# Altium PCB Open Source Programmable Load Main PCB.PcbDoc (part 1 of 2)
Units mil, origin at the board's own origin, x right, y up, seen from the top; angles counter-clockwise.
Board outline 6000 x 4000 mil, 2 copper layers (Top Layer, Bottom Layer); 90 components, 53 nets, 308 pads, 4 vias.
Unrouted connection lines stored in the file: 150.
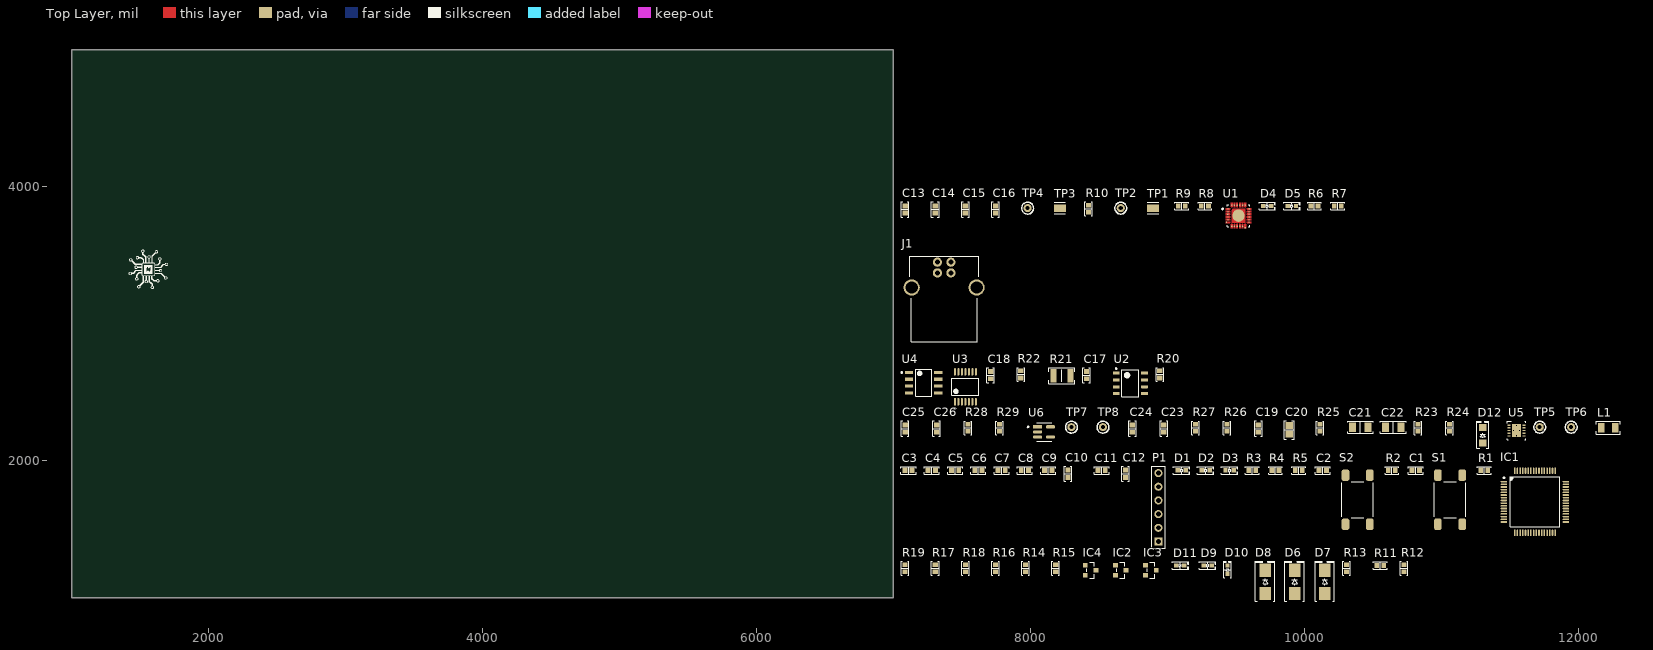
[diagram p0: Top Layer view]
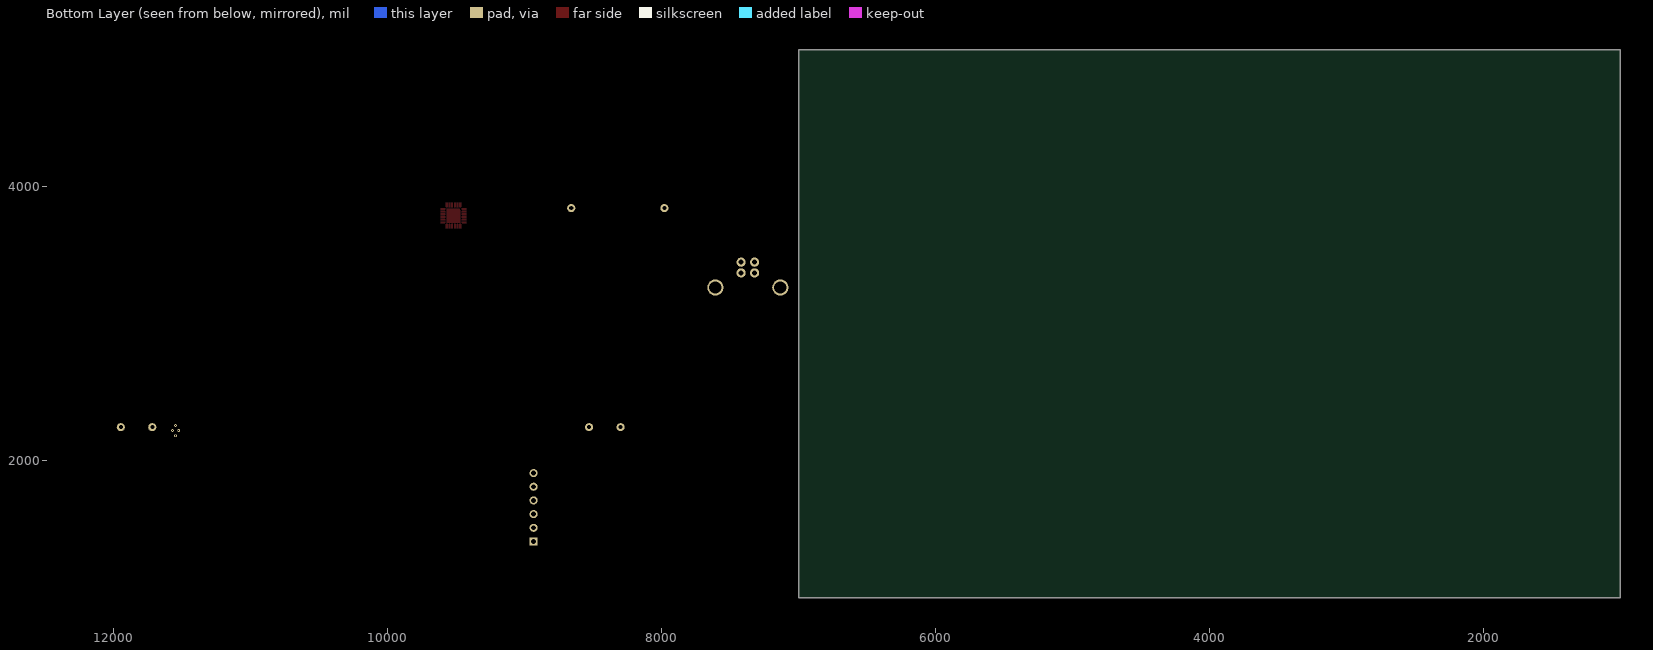
[diagram p1: Bottom Layer view, seen from below]

## Layer stack, top to bottom
Top Solder: solder mask 0.4, Solder Resist, Dk 3.5
Top Layer: signal copper 1.4
Dielectric 1: dielectric 12.6, FR-4, Dk 4.8
Bottom Layer: signal copper 1.4
Bottom Solder: solder mask 0.4, Solder Resist, Dk 3.5

## Board outline
1000,1000 7000,1000 7000,5000 1000,5000

## Design rules (kind name [scope] priority, off if disabled: settings)
Clearance [All] p1: gap=10 ignorepadtopadclearanceinfootprint=FALSE except(0: Arc-Hole Track-Hole SMDPad-Hole THPad-Hole Via-Hole Fill-Hole Poly-Hole Region-Hole Text-Hole)
DiffPairsRouting [All] p1: maxlimit=10 minlimit=10 mostfreqgap=10 toplayer_minwidth=15 toplayer_maxwidth=15 toplayer_prefwidth=15 bottomlayer_minwidth=15 bottomlayer_maxwidth=15 bottomlayer_prefwidth=15 maxuncoupledlength=500
PolygonConnect [All] p1: connectstyle=Relief reliefconductorwidth=10 reliefentries=4 polygonreliefangle="90 Angle" airgapwidth=10
RoomDefinition "USB Communication" [InComponentClass('USB Communication')] p1: confinementstyle=ConfineIn formatcopy=TRUE lockcomponents=FALSE outline 7045,3680 10320,3680 10320,4000 7045,4000
RoomDefinition "Top Level" [InComponentClass('Top Level')] p2: confinementstyle=ConfineIn formatcopy=TRUE lockcomponents=FALSE outline 7045,2840 7695,2840 7695,3630 7045,3630
RoomDefinition "Programmable Load" [InComponentClass('Programmable Load')] p3: confinementstyle=ConfineIn formatcopy=TRUE lockcomponents=FALSE outline 7045,2365 9100,2365 9100,2790 7045,2790
RoomDefinition Power [InComponentClass('Power')] p4: confinementstyle=ConfineIn formatcopy=TRUE lockcomponents=FALSE outline 7045,2080 12320,2080 12320,2400 7045,2400
RoomDefinition Microcontroller [InComponentClass('Microcontroller')] p5: confinementstyle=ConfineIn formatcopy=TRUE lockcomponents=FALSE outline 7045,1350 11955,1350 11955,2070 7045,2070
RoomDefinition "Fan Driver" [InComponentClass('Fan Driver')] p6: confinementstyle=ConfineIn formatcopy=TRUE lockcomponents=FALSE outline 7045,960 10875,960 10875,1375 7045,1375
RoutingVias [All] p1: holewidth=28 width=50 viastyle="Through Hole" minholewidth=28 minwidth=50 maxholewidth=28 maxwidth=50
SolderMaskExpansion [All] p1: expansion=4 istentingtop=FALSE
Width [All] p1: maxlimit=10 minlimit=10 preferedwidth=10
29 further rules are at their usual default settings.

## Classes and differential pairs
component class "USB Communication": C13 C14 C15 C16 D4 D5 R6 R7 R8 R9 R10 TP1 TP2 TP3 TP4 U1
component class "Top Level": J1
component class "Programmable Load": C17 C18 R20 R21 R22 U2 U3 U4
component class Power: C19 C20 C21 C22 C23 C24 C25 C26 D12 L1 R23 R24 R25 R26 R27 R28 R29 TP5 TP6 TP7 TP8 U5 U6
component class Microcontroller: C1 C2 C3 C4 C5 C6 C7 C8 C9 C10 C11 C12 D1 D2 D3 IC1 P1 R1 R2 R3 R4 R5 S1 S2
component class "Fan Driver": D6 D7 D8 D9 D10 D11 IC2 IC3 IC4 R11 R12 R13 R14 R15 R16 R17 R18 R19
differential pair USB: +USB_P -USB_N

## Components (designator, comment, footprint, x,y, rotation, side; value= is the part's Value field where it differs from the comment)
C1 "0.1 µF" "CAP 0603_1608" 10815,1930 r0 top
C2 "0.1 µF" "CAP 0603_1608" 10135,1930 r0 top
C3 "1 µF" "CAP 0603_1608" 7110,1930 r0 top
C4 "10000 pF" "CAP 0603_1608" 7280,1930 r0 top
C5 "4.7 µF" "CAP 0603_1608" 7450,1930 r0 top
C6 "0.1 µF" "CAP 0603_1608" 7620,1930 r0 top
C7 "4.7 µF" "CAP 0603_1608" 7790,1930 r0 top
C8 "0.1 µF" "CAP 0603_1608" 7960,1930 r0 top
C9 "4.7 µF" "CAP 0603_1608" 8130,1930 r0 top
C10 "0.1 µF" "CAP 0603_1608" 8275,1905 r90 top
C11 "4.7 µF" "CAP 0603_1608" 8520,1930 r0 top
C12 "0.1 µF" "CAP 0603_1608" 8695,1905 r90 top
C13 "4.7 µF" "CAP 0603_1608" 7085,3835 r90 top
C14 "0.1 µF" "CAP 0603_1608" 7305,3835 r90 top
C15 "4.7 µF" "CAP 0603_1608" 7525,3835 r90 top
C16 "0.1 µF" "CAP 0603_1608" 7745,3835 r90 top
C17 "0.1 µF" "CAP 0603_1608" 8410,2625 r90 top
C18 "0.1 µF" "CAP 0603_1608" 7710,2625 r90 top
C19 "4.7 µF" "CAP 0603_1608" 9665,2235 r90 top
C20 "1 µF" "CAP 0805_2012" 9890,2225 r90 top
C21 "22 µF" "CAP 1206_3216 - 0.8MM" 10410,2245 r0 top
C22 "22 µF" "CAP 1206_3216 - 0.8MM" 10650,2245 r0 top
C23 "0.1 µF" "CAP 0603_1608" 8975,2235 r90 top
C24 "820 pF" "CAP 0603_1608" 8745,2235 r90 top
C25 "1 µF" "CAP 0603_1608" 7085,2235 r90 top
C26 "1 µF" "CAP 0603_1608" 7315,2235 r90 top
D1 "Blue" "LED 0603_1608 BLUE" 9105,1930 r0 top
D2 "Red" "LED 0603_1608 RED" 9280,1930 r0 top
D3 "Green" "LED 0603_1608 GREEN" 9455,1930 r0 top
D4 "Blue" "LED 0603_1608 BLUE" 9730,3860 r0 top
D5 "Red" "LED 0603_1608 RED" 9910,3860 r0 top
D6 "S2A-13-F" "DO214AA SMB" 9930,1115 r90 top
D7 "S2A-13-F" "DO214AA SMB" 10150,1115 r90 top
D8 "S2A-13-F" "DO214AA SMB" 9715,1115 r90 top
D9 "Green" "LED 0603_1608 GREEN" 9295,1235 r0 top
D10 "Green" "LED 0603_1608 GREEN" 9440,1205 r90 top
D11 "Green" "LED 0603_1608 GREEN" 9095,1235 r0 top
D12 "V3F6HM3/H" "SMF DO-219AB" 11305,2185 r90 top
IC1 "STM32F446RET6" "ST LQFP-64 10X10MM" 11685,1700 r0 top
IC2 "DMG3418L-7" "DIODES SOT-23-3" 8660,1200 r0 top
IC3 "DMG3418L-7" "DIODES SOT-23-3" 8880,1200 r0 top
IC4 "DMG3418L-7" "DIODES SOT-23-3" 8440,1200 r0 top
J1 "61729-1011BLF" "FCI USB 61729-1011BLF" 7370,3265 r0 top
L1 "3.3µH" "IND 1008_2520" 12220,2240 r0 top
P1 "Header 6" HDR1X6 8935,1410 r90 top
R1 "100 kOhms" "RES 0603_1608" 11315,1930 r0 top
R2 "100 kOhms" "RES 0603_1608" 10640,1930 r0 top
R3 "1 kOhms" "RES 0603_1608" 9620,1930 r0 top
R4 "1 kOhms" "RES 0603_1608" 9790,1930 r0 top
R5 "1 kOhms" "RES 0603_1608" 9960,1930 r0 top
R6 "470 Ohms" "RES 0603_1608" 10075,3860 r0 top
R7 "470 Ohms" "RES 0603_1608" 10245,3860 r0 top
R8 "22.1 kOhms" "RES 0603_1608" 9275,3860 r0 top
R9 "47.5 kOhms" "RES 0603_1608" 9105,3860 r0 top
R10 "1 kOhms" "RES 0603_1608" 8425,3840 r90 top
R11 "4.7 kOhms" "RES 0603_1608" 10555,1235 r0 top
R12 "4.7 kOhms" "RES 0603_1608" 10730,1215 r90 top
R13 "4.7 kOhms" "RES 0603_1608" 10310,1215 r90 top
R14 "10 kOhms" "RES 0603_1608" 7965,1215 r90 top
R15 "10 kOhms" "RES 0603_1608" 8185,1215 r90 top
R16 "10 kOhms" "RES 0603_1608" 7745,1215 r90 top
R17 "10 kOhms" "RES 0603_1608" 7305,1215 r90 top
R18 "10 kOhms" "RES 0603_1608" 7525,1215 r90 top
R19 "10 kOhms" "RES 0603_1608" 7085,1215 r90 top
R20 "10 Ohms" "RES 0603_1608" 8945,2630 r90 top
R21 "2 mOhms" "STACKPOLE CSR1210" 8230,2620 r0 top
R22 "10 Ohms" "RES 0603_1608" 7930,2630 r90 top
R23 "0 Ohms" "RES 0603_1608" 10830,2240 r90 top
R24 "0 Ohms" "RES 0603_1608" 11060,2240 r90 top
R25 "158 kOhms" "RES 0603_1608" 10115,2240 r90 top
R26 "18 kOhms" "RES 0603_1608" 9435,2240 r90 top
R27 "68 kOhms" "RES 0603_1608" 9205,2240 r90 top
R28 "0 Ohms" "RES 0603_1608" 7545,2240 r90 top
R29 "0 Ohms" "RES 0603_1608" 7775,2240 r90 top
S1 "1571563-4" "TE FSM4JSMA" 11065,1715 r0 top
S2 "1571563-4" "TE FSM4JSMA" 10390,1715 r0 top
TP1 "S2751-46R" FP-S2751-46R-MFG 8895,3845 r0 top
TP2 "1.5mm Test Point" "1mm Test Point-Footprint-1" 8660,3845 r0 top
TP3 "S2751-46R" FP-S2751-46R-MFG 8215,3845 r0 top
TP4 "1.5mm Test Point" "1mm Test Point-Footprint-1" 7980,3845 r0 top
TP5 "1.5mm Test Point" "1mm Test Point-Footprint-1" 11720,2245 r0 top
TP6 "1.5mm Test Point" "1mm Test Point-Footprint-1" 11950,2245 r0 top
TP7 "1.5mm Test Point" "1mm Test Point-Footprint-1" 8300,2245 r0 top
TP8 "1.5mm Test Point" "1mm Test Point-Footprint-1" 8530,2245 r0 top
U1 "CP2102N-A02-GQFN24" FP-CP2102N-A02-GQFN24-MFG 9520,3790 r0 top
U2 "INA219AIDR" D0008A_L 8730,2565 r0 top
U3 "LMV324IPWR" FP-PW0014A-IPC_C 7525,2540 r90 top
U4 "LMV358IDR" FP-D0008A-MFG 7220,2570 r0 top
U5 "TPS61086DRCR" DRC0010A_V 11550,2220 r0 top
U6 "AP2112K-3.3TRG1" FP-SOT25-IPC_A 8100,2210 r0 top

## Footprints (in the part's own frame and the unit in brackets; to place one, negate y for a bottom-side part, rotate by r counter-clockwise, add the part's x,y. Pads: shape width x height; smd on the part's side, far side on the other; paste and mask are expansions set on the pad)
"1mm Test Point-Footprint-1" [mm]
  round 1.5 hole 0.75: 1(0,0)
  silkscreen extent -1.1,-1.1 1.1,1.1
"CAP 0603_1608" [mm] "Chip Capacitor, 2-Leads, Body 1.60x0.80mm, IPC Medium Density"
  rect 0.9x1 smd: 1(-0.675,0) 2(0.675,0)
  silkscreen extent -1.4,-0.7 1.4,0.7, body extent -0.8,-0.41 0.8,0.41, height 0.82
"CAP 0805_2012" [mm] "Chip Capacitor, 2-Leads, Body 2.00x1.20mm, IPC Medium Density"
  rect 1.3x1.4 smd: 1(-0.8,0) 2(0.8,0)
  silkscreen extent -1.7,-0.9 1.7,0.9, body extent -1,-0.64 1,0.64, height 1.26
"CAP 1206_3216 - 0.8MM" [mm] "Chip Capacitor, 2-Leads, Body 3.25x1.60mm, IPC Medium Density"
  rect 1.3x1.8 smd: 1(-1.45,0) 2(1.45,0)
  silkscreen extent -2.37,-1.12 2.37,1.12, body extent -1.6,-0.8 1.6,0.8, height 0.8
D0008A_L [mm] "SOIC, 8-Leads, Body 5x4mm, Pitch 1.27mm, IPC High Density"
  rrect18% 1.25x0.55 smd: 1(-2.625,1.905) 2(-2.625,0.635) 3(-2.625,-0.635) 4(-2.625,-1.905) 5(2.625,-1.905) 6(2.625,-0.635) 7(2.625,0.635) 8(2.625,1.905)
  silkscreen extent -2.75,-2.5 1.6,2.85, body extent -3,-2.45 3,2.45, height 1.63
"DIODES SOT-23-3" [mm] "SOT23, 3-Leads, Body 2.90x2.40mm, Pitch 0.95mm, IPC Medium Density"
  rect 0.9x0.8 smd: 1(-1,0.95) 2(-1,-0.95) 3(1,0)
  silkscreen extent -0.7,-1.45 0.7,1.45, body extent -1.41,-1.45 1.41,1.45, height 1.5
"DO214AA SMB" [mm] "Molded Diode, 2-Leads, Body 4.31x3.62mm, IPC Medium Density"
  rect 2.45x2.15 smd: 1(-2.15,0) 2(2.15,0)
  silkscreen extent -3.6,-1.8 3.8,1.8, body extent -2.6,-1.8 2.6,1.8, height 2.4
DRC0010A_V [mm] "SON, 10-Leads, Body 3x3mm, Pitch 0.5mm, Thermal Pad 2.4x1.65mm, TI Recommended"
  rrect42% 0.6x0.24 smd: 1(-1.4,1) 2(-1.4,0.5) 3(-1.4,0) 4(-1.4,-0.5) 5(-1.4,-1) 6(1.4,-1) 7(1.4,-0.5) 8(1.4,0) 9(1.4,0.5) 10(1.4,1)
  rrect6% 1.65x2.4 smd paste-0.825: 11(0,0)
  silkscreen extent -1.7,-1.7 1.7,1.7, body extent -1.55,-1.55 1.55,1.55, height 1.01
"FCI USB 61729-1011BLF" [mm]
  round 1.7 hole 0.92: 1(1.25,4.7) 2(-1.25,4.7) 3(-1.25,2.71) 4(1.25,2.71)
  round 3 hole 2.3: S(-6.02,0) S(6.02,0)
  silkscreen extent -6.4,-10.1 6.4,5.8, body extent -6.56,-10.18 6.56,5.76, height 11
FP-CP2102N-A02-GQFN24-MFG [mm]
  round 0.27 smd paste+0 mask+0: 1(-1.95,1.25) 2(-1.95,0.75) 3(-1.965,0.25) 4(-1.95,-0.25) 5(-1.95,-0.75) 6(-2.225,-1.25) 7(-1.25,-1.95) 8(-0.75,-1.95) 9(-0.25,-1.965) 10(0.25,-1.95) 11(0.75,-1.95) 12(1.25,-2.225) 13(1.95,-1.25) 14(1.95,-0.75) 15(1.965,-0.25) 16(1.95,0.25) 17(1.95,0.75) 18(1.965,1.25) 19(1.25,1.95) 20(0.75,1.95) 21(0.25,1.965) 22(-0.25,1.95) 23(-0.75,1.95) 24(-1.25,1.965)
  round 2.295 smd paste+0 mask+0: 25(0,0)
  Top Layer region: -1.275,-1.275 -1.275,1.025 -1.025,1.275 1.275,1.275 1.275,-1.275 -1.275,-1.275
  Top Layer region: -1.1,2.375 -1.1,1.675 -1.111,1.618 -1.144,1.569 -1.193,1.536 -1.25,1.525 -1.25,1.525 -1.307,1.536 -1.356,1.569 -1.389,1.618 -1.4,1.675 -1.4,1.675 -1.4,2.375
  Top Layer region: -0.6,2.375 -0.6,1.675 -0.611,1.618 -0.644,1.569 -0.693,1.536 -0.75,1.525 -0.75,1.525 -0.807,1.536 -0.856,1.569 -0.889,1.618 -0.9,1.675 -0.9,1.675 -0.9,2.375
  Top Layer region: -0.1,2.375 -0.1,1.675 -0.111,1.618 -0.144,1.569 -0.193,1.536 -0.25,1.525 -0.25,1.525 -0.307,1.536 -0.356,1.569 -0.389,1.618 -0.4,1.675 -0.4,1.675 -0.4,2.375
  Top Layer region: 0.4,2.375 0.4,1.675 0.389,1.618 0.356,1.569 0.307,1.536 0.25,1.525 0.25,1.525 0.193,1.536 0.144,1.569 0.111,1.618 0.1,1.675 0.1,1.675 0.1,2.375
  Top Layer region: 0.9,2.375 0.9,1.675 0.889,1.618 0.856,1.569 0.807,1.536 0.75,1.525 0.75,1.525 0.693,1.536 0.644,1.569 0.611,1.618 0.6,1.675 0.6,1.675 0.6,2.375
  Top Layer region: 1.4,2.375 1.4,1.675 1.389,1.618 1.356,1.569 1.307,1.536 1.25,1.525 1.25,1.525 1.193,1.536 1.144,1.569 1.111,1.618 1.1,1.675 1.1,1.675 1.1,2.375
  Top Layer region: 2.375,1.1 1.675,1.1 1.618,1.111 1.569,1.144 1.536,1.193 1.525,1.25 1.525,1.25 1.536,1.307 1.569,1.356 1.618,1.389 1.675,1.4 1.675,1.4 2.375,1.4
  Top Layer region: 2.375,0.6 1.675,0.6 1.618,0.611 1.569,0.644 1.536,0.693 1.525,0.75 1.525,0.75 1.536,0.807 1.569,0.856 1.618,0.889 1.675,0.9 1.675,0.9 2.375,0.9
  Top Layer region: 2.375,0.1 1.675,0.1 1.618,0.111 1.569,0.144 1.536,0.193 1.525,0.25 1.525,0.25 1.536,0.307 1.569,0.356 1.618,0.389 1.675,0.4 1.675,0.4 2.375,0.4
  Top Layer region: 2.375,-0.4 1.675,-0.4 1.618,-0.389 1.569,-0.356 1.536,-0.307 1.525,-0.25 1.525,-0.25 1.536,-0.193 1.569,-0.144 1.618,-0.111 1.675,-0.1 1.675,-0.1 2.375,-0.1
  Top Layer region: 2.375,-0.9 1.675,-0.9 1.618,-0.889 1.569,-0.856 1.536,-0.807 1.525,-0.75 1.525,-0.75 1.536,-0.693 1.569,-0.644 1.618,-0.611 1.675,-0.6 1.675,-0.6 2.375,-0.6
  Top Layer region: 2.375,-1.4 1.675,-1.4 1.618,-1.389 1.569,-1.356 1.536,-1.307 1.525,-1.25 1.525,-1.25 1.536,-1.193 1.569,-1.144 1.618,-1.111 1.675,-1.1 1.675,-1.1 2.375,-1.1
  Top Layer region: 1.1,-2.375 1.1,-1.675 1.111,-1.618 1.144,-1.569 1.193,-1.536 1.25,-1.525 1.25,-1.525 1.307,-1.536 1.356,-1.569 1.389,-1.618 1.4,-1.675 1.4,-1.675 1.4,-2.375
  Top Layer region: 0.6,-2.375 0.6,-1.675 0.611,-1.618 0.644,-1.569 0.693,-1.536 0.75,-1.525 0.75,-1.525 0.807,-1.536 0.856,-1.569 0.889,-1.618 0.9,-1.675 0.9,-1.675 0.9,-2.375
  Top Layer region: 0.1,-2.375 0.1,-1.675 0.111,-1.618 0.144,-1.569 0.193,-1.536 0.25,-1.525 0.25,-1.525 0.307,-1.536 0.356,-1.569 0.389,-1.618 0.4,-1.675 0.4,-1.675 0.4,-2.375
  Top Layer region: -0.4,-2.375 -0.4,-1.675 -0.389,-1.618 -0.356,-1.569 -0.307,-1.536 -0.25,-1.525 -0.25,-1.525 -0.193,-1.536 -0.144,-1.569 -0.111,-1.618 -0.1,-1.675 -0.1,-1.675 -0.1,-2.375
  Top Layer region: -0.9,-2.375 -0.9,-1.675 -0.889,-1.618 -0.856,-1.569 -0.807,-1.536 -0.75,-1.525 -0.75,-1.525 -0.693,-1.536 -0.644,-1.569 -0.611,-1.618 -0.6,-1.675 -0.6,-1.675 -0.6,-2.375
  Top Layer region: -1.4,-2.375 -1.4,-1.675 -1.389,-1.618 -1.356,-1.569 -1.307,-1.536 -1.25,-1.525 -1.25,-1.525 -1.193,-1.536 -1.144,-1.569 -1.111,-1.618 -1.1,-1.675 -1.1,-1.675 -1.1,-2.375
  Top Layer region: -2.375,-1.1 -1.675,-1.1 -1.618,-1.111 -1.569,-1.144 -1.536,-1.193 -1.525,-1.25 -1.525,-1.25 -1.536,-1.307 -1.569,-1.356 -1.618,-1.389 -1.675,-1.4 -1.675,-1.4 -2.375,-1.4
  Top Layer region: -2.375,-0.6 -1.675,-0.6 -1.618,-0.611 -1.569,-0.644 -1.536,-0.693 -1.525,-0.75 -1.525,-0.75 -1.536,-0.807 -1.569,-0.856 -1.618,-0.889 -1.675,-0.9 -1.675,-0.9 -2.375,-0.9
  Top Layer region: -2.375,-0.1 -1.675,-0.1 -1.618,-0.111 -1.569,-0.144 -1.536,-0.193 -1.525,-0.25 -1.525,-0.25 -1.536,-0.307 -1.569,-0.356 -1.618,-0.389 -1.675,-0.4 -1.675,-0.4 -2.375,-0.4
  Top Layer region: -2.375,0.4 -1.675,0.4 -1.618,0.389 -1.569,0.356 -1.536,0.307 -1.525,0.25 -1.525,0.25 -1.536,0.193 -1.569,0.144 -1.618,0.111 -1.675,0.1 -1.675,0.1 -2.375,0.1
  Top Layer region: -2.375,0.9 -1.675,0.9 -1.618,0.889 -1.569,0.856 -1.536,0.807 -1.525,0.75 -1.525,0.75 -1.536,0.693 -1.569,0.644 -1.618,0.611 -1.675,0.6 -1.675,0.6 -2.375,0.6
  Top Layer region: -2.375,1.4 -1.675,1.4 -1.618,1.389 -1.569,1.356 -1.536,1.307 -1.525,1.25 -1.525,1.25 -1.536,1.193 -1.569,1.144 -1.618,1.111 -1.675,1.1 -1.675,1.1 -2.375,1.1
  silkscreen extent -3.07,-2.05 2.05,2.05, body extent -2.48,-2.48 2.48,2.48, height 0.25
FP-D0008A-MFG [mm]
  rrect17% 1.55x0.6 smd paste+0 mask+0: 1(-2.7,1.905) 2(-2.7,0.635) 3(-2.7,-0.635) 4(-2.7,-1.905) 5(2.7,-1.905) 6(2.7,-0.635) 7(2.7,0.635) 8(2.7,1.905)
  silkscreen extent -4.17,-2.5 1.5,2.5, body extent -3.57,-2.75 3.57,2.75, height 0.25
FP-PW0014A-IPC_C [mm]
  rect 1.355x0.341 smd paste+0 mask+0: 1(-2.775,1.95)
  rrect100% 1.355x0.341 smd paste+0 mask+0: 2(-2.775,1.3) 3(-2.775,0.65) 4(-2.775,0) 5(-2.775,-0.65) 6(-2.775,-1.3) 7(-2.775,-1.95) 8(2.775,-1.95) 9(2.775,-1.3) 10(2.775,-0.65) 11(2.775,0) 12(2.775,0.65) 13(2.775,1.3) 14(2.775,1.95)
  silkscreen extent -4.17,-2.5 1.6,2.5, body extent -3.55,-2.6 3.55,2.6, height 0.25
FP-S2751-46R-MFG [mm]
  rect 2.2x1.4 smd paste+0 mask+0: 1(0,0)
  silkscreen extent -1.05,-1.07 1.05,1.07, body extent -1.2,-0.8 1.2,0.8, height 0.25
FP-SOT25-IPC_A [mm]
  rect 1.707x0.616 smd paste+0 mask+0: 1(-1.201,0.95)
  rrect100% 1.707x0.616 smd paste+0 mask+0: 2(-1.201,0) 3(-1.201,-0.95) 4(1.201,-0.95) 5(1.201,0.95)
  silkscreen extent -3.08,-1.75 1.4,1.75, body extent -2.55,-2 2.55,2, height 0.25
HDR1X6 [mm] "Connector; Header; 6 Position"
  rect 1.5x1.5 hole 0.9: 1(0,0)
  round 1.5 hole 0.9: 2(2.54,0) 3(5.08,0) 4(7.62,0) 5(10.16,0) 6(12.7,0)
  silkscreen extent -1.27,-1.27 13.97,1.27
"IND 1008_2520" [mm] "Chip Inductance, 2-leads, Body 2.5x2.1mm, IPC Medium Density"
  rect 1.2x1.75 smd: 1(-1.275,0) 2(1.275,0)
  silkscreen extent -2.18,-1.22 2.2,1.22, body extent -1.3,-1.05 1.3,1.05, height 1
"LED 0603_1608 BLUE" [mm] "Chip Diode, 2-Leads, Body 1.60x0.80mm, IPC Medium Density"
  rect 0.8x0.8 smd: 1(-0.75,0) 2(0.75,0)
  silkscreen extent -1.52,-0.7 1.52,0.7, body extent -0.8,-0.4 0.8,0.4, height 0.53
"LED 0603_1608 GREEN" [mm] "Chip Diode, 2-Leads, Body 1.60x0.80mm, IPC Medium Density"
  rect 0.8x0.8 smd: 1(-0.75,0) 2(0.75,0)
  silkscreen extent -1.52,-0.7 1.52,0.7, body extent -0.8,-0.4 0.8,0.4, height 0.53
"LED 0603_1608 RED" [mm] "Chip Diode, 2-Leads, Body 1.60x0.80mm, IPC Medium Density"
  rect 0.8x0.8 smd: 1(-0.75,0) 2(0.75,0)
  silkscreen extent -1.52,-0.7 1.52,0.7, body extent -0.8,-0.4 0.8,0.4, height 0.53
"RES 0603_1608" [mm] "Chip Resistor, 2-Leads, Body 1.60x0.80mm, IPC Medium Density"
  rect 0.85x0.95 smd: 1(-0.65,0) 2(0.65,0)
  silkscreen extent -1.27,-0.7 1.27,0.7, body extent -0.8,-0.4 0.8,0.4, height 0.45
"SMF DO-219AB" [mm] "Molded Diode, 2-Leads, Body 3.90x1.90mm, IPC Medium Density"
  rect 1.3x1.4 smd: 1(-1.45,0) 2(1.45,0)
  silkscreen extent -2.4,-1.1 2.59,1.1, body extent -1.5,-0.9 1.5,0.9, height 1.18
"ST LQFP-64 10X10MM" [mm] "LQFP, 64-Leads, Body 10.00x10.00mm, Pitch 0.50mm, IPC Medium Density"
  oval 1.2x0.3 smd: 1(-5.75,3.75) 2(-5.75,3.25) 3(-5.75,2.75) 4(-5.75,2.25) 5(-5.75,1.75) 6(-5.75,1.25) 7(-5.75,0.75) 8(-5.75,0.25) 9(-5.75,-0.25) 10(-5.75,-0.75) 11(-5.75,-1.25) 12(-5.75,-1.75) 13(-5.75,-2.25) 14(-5.75,-2.75) 15(-5.75,-3.25) 16(-5.75,-3.75) 33(5.75,-3.75) 34(5.75,-3.25) 35(5.75,-2.75) 36(5.75,-2.25) 37(5.75,-1.75) 38(5.75,-1.25) 39(5.75,-0.75) 40(5.75,-0.25) 41(5.75,0.25) 42(5.75,0.75) 43(5.75,1.25) 44(5.75,1.75) 45(5.75,2.25) 46(5.75,2.75) 47(5.75,3.25) 48(5.75,3.75)
  oval 0.3x1.2 smd: 17(-3.75,-5.75) 18(-3.25,-5.75) 19(-2.75,-5.75) 20(-2.25,-5.75) 21(-1.75,-5.75) 22(-1.25,-5.75) 23(-0.75,-5.75) 24(-0.25,-5.75) 25(0.25,-5.75) 26(0.75,-5.75) 27(1.25,-5.75) 28(1.75,-5.75) 29(2.25,-5.75) 30(2.75,-5.75) 31(3.25,-5.75) 32(3.75,-5.75) 49(3.75,5.75) 50(3.25,5.75) 51(2.75,5.75) 52(2.25,5.75) 53(1.75,5.75) 54(1.25,5.75) 55(0.75,5.75) 56(0.25,5.75) 57(-0.25,5.75) 58(-0.75,5.75) 59(-1.25,5.75) 60(-1.75,5.75) 61(-2.25,5.75) 62(-2.75,5.75) 63(-3.25,5.75) 64(-3.75,5.75)
  silkscreen extent -5.87,-4.6 4.6,4.6, body extent -6.01,-6.01 6.01,6.01, height 1.6
"STACKPOLE CSR1210" [mm] "Chip Resistor, 2-Leads, Body 3.1x2.6mm, IPC Medium Density"
  rect 1.15x2.5 smd: 1(-1.575,0) 2(1.575,0)
  silkscreen extent -2.4,-1.5 2.4,1.5, body extent -1.6,-1.3 1.6,1.3, height 0.55
"TE FSM4JSMA" [mm]
  rrect50% 1.4x2.1 smd: 1(2.25,4.55) 2(2.25,-4.55) 3(-2.25,4.55) 4(-2.25,-4.55)
  silkscreen extent -2.92,-3.3 2.92,3.3, body extent -3,-5 3,5, height 5.08

## Part data
C1 C2 C6 C8 C10 C12 C14 C16 C17 C18 C23: library part C0603C104K5RAC7411, "CAP CER 0.1UF 50V X7R 0603", Device Package="0603 (1608 Metric)", manufacturer=KEMET, Operating Temperature="-55°C ~ 125°C", Supplier Part Number 1=399-7374-2-ND, Temperature Coefficient=X7R, Tolerance=±10%, Voltage - Rated=50V, Applications="Bypass, Decoupling", Capacitance="0.1 µF", componentlink1description=Datasheet, componentlink1url=https://api.kemet.com/component-edge/download/datasheet/C0603C104K5RAC7411.pdf, componentlink2description="DigiKey Link", componentlink2url=https://www.digikey.com/en/products/detail/kemet/C0603C104K5RAC7411/3317013, lastupdated="2022-09-13 6:40:53 AM", Lifecycle Status=Active, Minimum Order=15000, Mounting Type="Surface Mount, MLCC", Package / Case="0603 (1608 Metric)", packaging=TapeAndReel, Part Number=C0603C104K5RAC7411, Part Status=Active, partid=2233, price=0.01, series="SMD Comm X7R", Size / Dimension="0.063\" L x 0.031\" W (1.60mm x 0.80mm)", Supplier 1=DigiKey, Thickness (Max)="0.035\" (0.90mm)"
C3 C25 C26: library part CC0603KRX7R6BB105, "CAP CER 1UF 10V X7R 0603", Device Package="0603 (1608 Metric)", manufacturer=Yageo, Operating Temperature="-55°C ~ 125°C", Supplier Part Number 1=311-1796-1-ND, Temperature Coefficient=X7R, Tolerance=±10%, Voltage - Rated=10V, Applications="General Purpose", Capacitance="1 µF", componentlink1description=Datasheet, componentlink1url=https://www.yageo.com/upload/media/product/productsearch/datasheet/mlcc/UPY-GPHC_X7R_6.3V-to-50V_18.pdf, componentlink2description="DigiKey Link", componentlink2url=https://www.digikey.com/en/products/detail/yageo/CC0603KRX7R6BB105/5195204, lastupdated="2022-09-13 6:40:53 AM", Lifecycle Status=Active, Minimum Order=1, Mounting Type="Surface Mount, MLCC", Package / Case="0603 (1608 Metric)", packaging=TapeAndReel, Part Number=CC0603KRX7R6BB105, Part Status=Active, partid=2290, price=0.02, series=CC, Size / Dimension="0.063\" L x 0.031\" W (1.60mm x 0.80mm)", Supplier 1=DigiKey, Thickness (Max)="0.035\" (0.90mm)"
C4: library part C0603C103K4RECAUTO, "CAP CER 0603 10NF 16V X7R 10%", Device Package="0603 (1608 Metric)", manufacturer=KEMET, Operating Temperature="-55°C ~ 125°C", Ratings=AEC-Q200, Supplier Part Number 1=399-17880-1-ND, Temperature Coefficient=X7R, Tolerance=±10%, Voltage - Rated=16V, Applications="Automotive, ESD Protection", Capacitance="10000 pF", componentlink1description=Datasheet, componentlink1url=https://api.kemet.com/component-edge/download/datasheet/C0603C103K4RECAUTO.pdf, componentlink2description="DigiKey Link", componentlink2url=https://www.digikey.com/en/products/detail/kemet/C0603C103K4RECAUTO/8640474, lastupdated="2022-09-13 6:40:37 AM", Lifecycle Status=Active, Minimum Order=1, Mounting Type="Surface Mount, MLCC", Package / Case="0603 (1608 Metric)", packaging=TapeAndReel, Part Number=C0603C103K4RECAUTO, Part Status=Active, partid=8251, price=0.01, series="ESD SMD Auto X7R", Size / Dimension="0.063\" L x 0.031\" W (1.60mm x 0.80mm)", Supplier 1=DigiKey, Thickness (Max)="0.034\" (0.87mm)"
C5 C7 C9 C11 C13 C15 C19: library part CL10A475KP8NNNC, "CAP CER 4.7UF 10V X5R 0603", Device Package="0603 (1608 Metric)", manufacturer="Samsung Electro-Mechanics", Operating Temperature="-55°C ~ 85°C", Supplier Part Number 1=1276-1044-1-ND, Temperature Coefficient=X5R, Tolerance=±10%, Voltage - Rated=10V, Applications="General Purpose", Capacitance="4.7 µF", componentlink1description=Datasheet, componentlink1url=http://www.samsungsem.com/kr/support/product-search/mlcc/CL10A475KP8NNNC.jsp, componentlink2description="DigiKey Link", componentlink2url=https://www.digikey.com/en/products/detail/samsung-electro-mechanics/CL10A475KP8NNNC/3886702, lastupdated="2022-09-13 6:40:44 AM", Lifecycle Status=Active, Minimum Order=1, Mounting Type="Surface Mount, MLCC", Package / Case="0603 (1608 Metric)", packaging=TapeAndReel, Part Number=CL10A475KP8NNNC, Part Status=Active, partid=5671, price=0.01, series=CL, Size / Dimension="0.063\" L x 0.031\" W (1.60mm x 0.80mm)", Supplier 1=DigiKey, Thickness (Max)="0.035\" (0.90mm)"
C20: library part GCJ21BR71H105KA01L, "CAP CER 1UF 50V X7R 0805", Device Package="0805 (2012 Metric)", manufacturer="Murata Electronics", Operating Temperature="-55°C ~ 125°C", Ratings=AEC-Q200, Supplier Part Number 1=490-10667-1-ND, Temperature Coefficient=X7R, Tolerance=±10%, Voltage - Rated=50V, Applications="Automotive, Boardflex Sensitive", Capacitance="1 µF", componentlink1description=Datasheet, componentlink1url=https://www.murata.com/~/media/webrenewal/support/library/catalog/products/capacitor/mlcc/c03e.ashx?la=en-us, componentlink2description="DigiKey Link", componentlink2url=https://www.digikey.com/en/products/detail/murata-electronics/GCJ21BR71H105KA01L/4903512, Features="Soft Termination", lastupdated="2023-01-02 8:10:56 PM", Lifecycle Status=Active, Minimum Order=1, Mounting Type="Surface Mount, MLCC", Package / Case="0805 (2012 Metric)", packaging=TapeAndReel, Part Number=GCJ21BR71H105KA01L, Part Status=Active, partid=2709, price=0.06, series=GCJ, Size / Dimension="0.079\" L x 0.049\" W (2.00mm x 1.25mm)", Supplier 1=DigiKey, Thickness (Max)="0.057\" (1.45mm)"
C21 C22: library part CL31A226MOCLNNC, "CAP CER 22UF 16V X5R 1206", Device Package="1206 (3216 Metric)", manufacturer="Samsung Electro-Mechanics", Operating Temperature="-55°C ~ 85°C", Supplier Part Number 1=1276-2728-1-ND, Temperature Coefficient=X5R, Tolerance=±20%, Voltage - Rated=16V, Applications="General Purpose", Capacitance="22 µF", componentlink1description=Datasheet, componentlink1url=http://www.samsungsem.com/kr/support/product-search/mlcc/CL31A226MOCLNNC.jsp, componentlink2description="DigiKey Link", componentlink2url=https://www.digikey.com/en/products/detail/samsung-electro-mechanics/CL31A226MOCLNNC/3888386, Features="Low Profile", lastupdated="2023-01-02 8:12:59 PM", Lifecycle Status=Active, Minimum Order=1, Mounting Type="Surface Mount, MLCC", Package / Case="1206 (3216 Metric)", packaging=TapeAndReel, Part Number=CL31A226MOCLNNC, Part Status=Active, partid=19106, price=0.04, series=CL, Size / Dimension="0.126\" L x 0.063\" W (3.20mm x 1.60mm)", Supplier 1=DigiKey, Thickness (Max)="0.037\" (0.95mm)"
C24: library part C0603C821K5RACAUTO, "CAP CER 820PF 50V X7R 0603", Device Package="0603 (1608 Metric)", manufacturer=KEMET, Operating Temperature="-55°C ~ 125°C", Ratings=AEC-Q200, Supplier Part Number 1=399-17600-1-ND, Temperature Coefficient=X7R, Tolerance=±10%, Voltage - Rated=50V, Applications="Automotive, Bypass, Decoupling", Capacitance="820 pF", componentlink1description=Datasheet, componentlink1url=https://api.kemet.com/component-edge/download/datasheet/C0603C821K5RACAUTO.pdf, componentlink2description="DigiKey Link", componentlink2url=https://www.digikey.com/en/products/detail/kemet/C0603C821K5RACAUTO/8572435, lastupdated="2023-01-02 8:07:53 PM", Lifecycle Status=Active, Minimum Order=1, Mounting Type="Surface Mount, MLCC", Package / Case="0603 (1608 Metric)", packaging=TapeAndReel, Part Number=C0603C821K5RACAUTO, Part Status=Active, partid=3747, price=0.01, series="SMD Auto X7R", Size / Dimension="0.063\" L x 0.031\" W (1.60mm x 0.80mm)", Supplier 1=DigiKey, Thickness (Max)="0.034\" (0.87mm)"
D1 D4: library part LTST-C193TBKT-5A, "LED BLUE CLEAR CHIP SMD", Current - Test=5mA, Device Package="0603 (1608 Metric)", Lens Color=Colorless, manufacturer="Lite-On Inc.", Millicandela Rating=15mcd, Supplier Device Package="Chip LED", Supplier Part Number 1=160-1827-1-ND, Voltage - Forward (Vf) (Typ)=2.8V, Color=Blue, componentlink1description=Datasheet, componentlink1url=//media.digikey.com/pdf/Data%20Sheets/Lite-On%20PDFs/LTST-C193TBKT-5A.pdf, componentlink2description="DigiKey Link", componentlink2url=http://digikey.com/product-detail/en/lite-on-inc/LTST-C193TBKT-5A/160-1827-1-ND/2355044, Configuration=Standard, Height (Max)=0.45mm, lastupdated="2022-09-13 7:29:17 AM", Lens Size="1.15mm x 0.80mm", Lens Style="Rectangle with Flat Top", Lens Transparency=Clear, Lifecycle Status=Active, Minimum Order=1, Mounting Type="Surface Mount", Package / Case="0603 (1608 Metric)", packaging=TapeAndReel, Part Number=LTST-C193TBKT-5A, Part Status=Active, partid=829, price=0.06, series=-, Size / Dimension="1.60mm L x 0.80mm W", Supplier 1=DigiKey, Viewing Angle=130°, Wavelength - Dominant=470nm, Wavelength - Peak=468nm
D2 D5: library part LTST-C190KAKT, "LED RED CLEAR CHIP SMD", Current - Test=20mA, Device Package="0603 (1608 Metric)", Lens Color=Colorless, manufacturer="Lite-On Inc.", Millicandela Rating=80mcd, Supplier Device Package="Chip LED", Supplier Part Number 1=160-1433-1-ND, Voltage - Forward (Vf) (Typ)=2V, Color=Red, componentlink1description=Datasheet, componentlink1url=//media.digikey.com/pdf/Data%20Sheets/Lite-On%20PDFs/LTST-C150,170,190KxKT.pdf, componentlink2description="DigiKey Link", componentlink2url=http://digikey.com/product-detail/en/lite-on-inc/LTST-C190KAKT/160-1433-1-ND/386810, Configuration=Standard, Height (Max)=0.90mm, lastupdated="2022-09-13 7:29:57 AM", Lens Size="1.06mm x 0.80mm", Lens Style="Rectangle with Flat Top", Lens Transparency=Clear, Lifecycle Status=Active, Minimum Order=1, Mounting Type="Surface Mount", Package / Case="0603 (1608 Metric)", packaging=TapeAndReel, Part Number=LTST-C190KAKT, Part Status=Active, partid=384, price=0.07, series=-, Size / Dimension="1.60mm L x 0.80mm W", Supplier 1=DigiKey, Viewing Angle=130°, Wavelength - Dominant=615nm, Wavelength - Peak=621nm
D3 D9 D10 D11: library part XZVGT53W-6, "LED GREEN CLEAR 2SMD", Current - Test=20mA, Device Package="0603 (1608 Metric)", Lens Color=Colorless, manufacturer=SunLED, Millicandela Rating=49mcd, Supplier Device Package=2-SMD, Supplier Part Number 1=1497-1243-1-ND, Voltage - Forward (Vf) (Typ)=2.1V, Color=Green, componentlink1description=Datasheet, componentlink1url=https://www.sunledusa.com/products/spec/XZVGT53W-6.pdf, componentlink2description="DigiKey Link", componentlink2url=https://www.digikey.com/en/products/detail/sunled/XZVGT53W-6/4902128, Configuration=Standard, Height (Max)=0.28mm, lastupdated="2022-09-13 7:29:38 AM", Lens Size="1.20mm x 0.80mm", Lens Style="Rectangle with Flat Top", Lens Transparency=Clear, Lifecycle Status=Active, Minimum Order=1, Mounting Type="Surface Mount", Package / Case="0603 (1608 Metric)", packaging=TapeAndReel, Part Number=XZVGT53W-6, Part Status=Active, partid=581, price=0.05, series=-, Size / Dimension="1.60mm L x 0.80mm W", Supplier 1=DigiKey, Viewing Angle=120°, Wavelength - Dominant=570nm, Wavelength - Peak=574nm
D6 D7 D8: "DIODE GEN PURP 50V 1.5A SMB", Capacitance @ Vr, F="20pF @ 4V, 1MHz", Current - Average Rectified (Io)=1.5A, Current - Reverse Leakage @ Vr="5 µA @ 50 V", manufacturer="Diodes Incorporated", Operating Temperature - Junction="-65°C ~ 150°C", Package / Case="DO-214AA, SMB", Supplier Device Package=SMB, Supplier Part Number 1=S2A-FDICT-ND, Voltage - DC Reverse (Vr) (Max)="50 V", Voltage - Forward (Vf) (Max) @ If="1.15 V @ 1.5 A", componentlink1description=Datasheet, componentlink1url=https://www.diodes.com/assets/Datasheets/ds16004.pdf, componentlink2description="DigiKey Link", componentlink2url=https://www.digikey.com/en/products/detail/diodes-incorporated/S2A-13-F/814429, Diode Type=Standard, lastupdated="2022-09-19 1:45:35 PM", Lifecycle Status=Active, Minimum Order=1, Mounting Type="Surface Mount", packaging=TapeAndReel, Part Number=S2A-13-F, Part Status=Active, partid=302, price=0.05, series=-, Speed="Standard Recovery >500ns, > 200mA (Io)", Supplier 1=DigiKey
D12: "3A,60V,SMF,TRENCH SKY RECT.", Capacitance @ Vr, F="310pF @ 4V, 1MHz", Current - Average Rectified (Io)=3A, Current - Reverse Leakage @ Vr="600µA @ 60V", manufacturer="Vishay Semiconductor Diodes Division", Operating Temperature - Junction="-40°C ~ 150°C", Package / Case=DO-219AB, Supplier Device Package="DO-219AB (SMF)", Supplier Part Number 1=V3F6HM3/HGICT-ND, Voltage - DC Reverse (Vr) (Max)=60V, Voltage - Forward (Vf) (Max) @ If="620mV @ 3A", componentlink1description=Datasheet, componentlink1url=http://www.vishay.com/docs/87565/v3f6.pdf, componentlink2description="DigiKey Link", componentlink2url=http://digikey.com/product-detail/en/vishay-semiconductor-diodes-division/V3F6HM3-H/V3F6HM3-HGICT-ND/9360098, Diode Type=Schottky, lastupdated="2023-01-02 9:00:33 PM", Lifecycle Status=Active, Minimum Order=1, Mounting Type="Surface Mount", packaging=TapeAndReel, Part Number=V3F6HM3/H, Part Status=Active, partid=1309, price=0.11, series="Automotive, AEC-Q101, eSMP®, TMBS®", Speed="Fast Recovery =< 500ns, > 200mA (Io)", Supplier 1=DigiKey
IC1: "IC MCU 32BIT 512KB FLASH 64LQFP", manufacturer=STMicroelectronics, Operating Temperature="-40°C ~ 85°C (TA)", Package / Case=64-LQFP, Supplier Device Package="64-LQFP (10x10)", Supplier Part Number 1=497-15376-ND, Voltage - Supply (Vcc/Vdd)="1.7V ~ 3.6V", componentlink1description=Datasheet, componentlink1url=http://www.st.com/content/ccc/resource/technical/document/datasheet/65/cb/75/50/53/d6/48/24/DM00141306.pdf/files/DM00141306.pdf/jcr:content/translations/en.DM00141306.pdf, componentlink2description="DigiKey Link", componentlink2url=http://digikey.com/product-detail/en/stmicroelectronics/STM32F446RET6/497-15376-ND/5175962, Connectivity="CANbus, EBI/EMI, I²C, IrDA, LINbus, SAI, SD, SPDIF-Rx, SPI, UART/USART, USB, USB OTG", Core Processor="ARM® Cortex®-M4", Core Size=32-Bit, Data Converters="A/D 16x12b; D/A 2x12b", lastupdated="2022-09-13 7:33:02 AM", Lifecycle Status=Active, Minimum Order=1, Mounting Type="Surface Mount", Number of I/O=50, Oscillator Type=Internal, packaging=Tray, Part Number=STM32F446RET6, Part Status=Active, partid=121, Peripherals="Brown-out Detect/Reset, DMA, I²S, LVD, POR, PWM, WDT", price=7.28, Program Memory Size="512KB (512K x 8)", Program Memory Type=FLASH, RAM Size="128K x 8", series=STM32F4, Speed=180MHz, Supplier 1=DigiKey
IC2 IC3 IC4: "MOSFET N-CH 30V 4A SOT23", Current - Continuous Drain (Id) @ 25°C="4A (Ta)", Drain to Source Voltage (Vdss)="30 V", Drive Voltage (Max Rds On,  Min Rds On)="2.5V, 10V", Input Capacitance (Ciss) (Max) @ Vds="464.3 pF @ 15 V", manufacturer="Diodes Incorporated", Operating Temperature="-55°C ~ 150°C (TJ)", Package / Case="TO-236-3, SC-59, SOT-23-3", Power Dissipation (Max)="1.4W (Ta)", Supplier Device Package=SOT-23-3, Supplier Part Number 1=DMG3418L-7DICT-ND, componentlink1description=Datasheet, componentlink1url=https://www.diodes.com/assets/Datasheets/DMG3418L.pdf, componentlink2description="DigiKey Link", componentlink2url=https://www.digikey.com/en/products/detail/diodes-incorporated/DMG3418L-7/4810932, FET Type=N-Channel, Gate Charge (Qg) (Max) @ Vgs="5.5 nC @ 4.5 V", lastupdated="2022-09-19 2:00:12 PM", Lifecycle Status=Active, Minimum Order=1, Mounting Type="Surface Mount", packaging=TapeAndReel, Part Number=DMG3418L-7, Part Status=Active, price=0.09, Rds On (Max) @ Id, Vgs="60mOhm @ 4A, 10V", series=-, Supplier 1=DigiKey, Technology="MOSFET (Metal Oxide)", Vgs (Max)=±12V, Vgs(th) (Max) @ Id="1.5V @ 250µA"
J1: "CONN RCPT USB2.0 TYPEB 4POS R/A", Current Rating (Amps)=1A, manufacturer="Amphenol ICC (FCI)", Operating Temperature="-55°C ~ 85°C", Supplier Part Number 1=609-3657-ND, componentlink1description=Datasheet, componentlink1url=http://www.amphenol-icc.com/media/wysiwyg/files/drawing/61729.pdf, componentlink2description="DigiKey Link", componentlink2url=//digikey.com/product-detail/en/amphenol-icc-fci/61729-1011BLF/609-3657-ND/1490763, Connector Type="USB - B", Features="Board Lock", Gender=Receptacle, lastupdated="2019-12-09 8:52:52 PM", Lifecycle Status=0, Mating Cycles=1500, Minimum Order=1, Mounting Feature=Horizontal, Mounting Type="Through Hole, Right Angle", Number of Contacts=4, Number of Ports=1, packaging=Tube, Part Number=61729-1011BLF, Part Status=Active, price=0.99, series=61729, Shielding=Shielded, Specifications="USB 2.0", Supplier 1=DigiKey, Termination=Solder
L1: library part DFE252010F-3R3M=P2, "FIXED IND 3.3UH 1.6A 170 MOHM", Current - Saturation=2.5A, Current Rating (Amps)=1.6A, DC Resistance (DCR)="170mOhm Max", Device Package="1008 (2520 Metric)", Inductance Frequency - Test=1MHz, manufacturer="Murata Electronics", Operating Temperature="-40°C ~ 125°C", Part Number=DFE252010F-3R3M=P2, Supplier Part Number 1=490-13043-1-ND, Tolerance=±20%, componentlink1description=Datasheet, componentlink1url=https://search.murata.co.jp/Ceramy/image/img/P02/J(E)TE243A-0012_DFE252010F_reference.pdf, componentlink2description="DigiKey Link", componentlink2url=http://digikey.com/product-detail/en/murata-electronics/DFE252010F-3R3M=P2/490-13043-1-ND/5812755, Height - Seated (Max)="0.039\" (1.00mm)", Inductance=3.3µH, lastupdated="2020-09-02 1:29:31 AM", Lifecycle Status=Active, Material - Core="Iron Powder", Minimum Order=1, Mounting Type="Surface Mount", Package / Case="1008 (2520 Metric)", packaging=TapeAndReel, Part Status=Active, partid=3497, price=0.23, series=DFE252010F, Shielding=Shielded, Size / Dimension="0.098\" L x 0.079\" W (2.50mm x 2.00mm)", Supplier 1=DigiKey
P1: "Header, 6-Pin", LatestRevisionDate=17-Jul-2002, LatestRevisionNote="Re-released for DXP Platform.", Publisher="Altium Limited"
R1 R2: library part CRCW0603100KFKEAC, "RES 100K OHM 1% 1/10W 0603", Device Package="0603 (1608 Metric)", manufacturer="Vishay Dale", Operating Temperature="-55°C ~ 155°C", Power (Watts)="0.1W, 1/10W", Supplier Device Package=0603, Supplier Part Number 1=541-3950-1-ND, Temperature Coefficient=±100ppm/°C, Tolerance=±1%, componentlink1description=Datasheet, componentlink1url=http://www.vishay.com/docs/28773/crcwce3.pdf, componentlink2description="DigiKey Link", componentlink2url=https://www.digikey.com/en/products/detail/vishay-dale/CRCW0603100KFKEAC/7928372, Composition="Thick Film", Height - Seated (Max)="0.022\" (0.55mm)", lastupdated="2022-09-13 7:03:10 AM", Lifecycle Status=Active, Minimum Order=1, Number of Terminations=2, Package / Case="0603 (1608 Metric)", packaging=CutTape, Part Number=CRCW0603100KFKEAC, Part Status=Active, partid=12549, price=0.01, Resistance="100 kOhms", series=CRCW-C, Supplier 1=DigiKey
R3 R4 R5: library part RT0603FRE071KL, "RES SMD 1K OHM 1% 1/10W 0603", Device Package="0603 (1608 Metric)", manufacturer=Yageo, Operating Temperature="-55°C ~ 155°C", Power (Watts)="0.1W, 1/10W", Supplier Device Package=0603, Supplier Part Number 1=YAG2323CT-ND, Temperature Coefficient=±50ppm/°C, Tolerance=±1%, componentlink1description=Datasheet, componentlink1url=https://www.yageo.com/upload/media/product/productsearch/datasheet/rchip/PYu-RT_1-to-0.01_RoHS_L_11.pdf, componentlink2description="DigiKey Link", componentlink2url=https://www.digikey.com/en/products/detail/yageo/RT0603FRE071KL/1075188, Composition="Thin Film", Height - Seated (Max)="0.022\" (0.55mm)", lastupdated="2022-09-14 8:09:45 AM", Lifecycle Status=Active, Minimum Order=1, Number of Terminations=2, Package / Case="0603 (1608 Metric)", packaging=TapeAndReel, Part Number=RT0603FRE071KL, Part Status=Active, partid=5672, price=0.01, Resistance="1 kOhms", series=RT, Size / Dimension="0.063\" L x 0.031\" W (1.60mm x 0.80mm)", Supplier 1=DigiKey
R6 R7: library part ERJ-3EKF4700V, "RES SMD 470 OHM 1% 1/10W 0603", Device Package="0603 (1608 Metric)", manufacturer="Panasonic Electronic Components", Operating Temperature="-55°C ~ 155°C", Power (Watts)="0.1W, 1/10W", Ratings=AEC-Q200, Supplier Device Package=0603, Supplier Part Number 1=P470HCT-ND, Temperature Coefficient=±100ppm/°C, Tolerance=±1%, componentlink1description=Datasheet, componentlink1url=https://industrial.panasonic.com/cdbs/www-data/pdf/RDA0000/AOA0000C304.pdf, componentlink2description="DigiKey Link", componentlink2url=https://www.digikey.com/en/products/detail/panasonic-electronic-components/ERJ-3EKF4700V/1746417, Composition="Thick Film", Features="Automotive AEC-Q200", Height - Seated (Max)="0.022\" (0.55mm)", lastupdated="2022-09-14 8:09:45 AM", Lifecycle Status=Active, Minimum Order=1, Number of Terminations=2, Package / Case="0603 (1608 Metric)", packaging=TapeAndReel, Part Number=ERJ-3EKF4700V, Part Status=Active, partid=5664, price=0.01, Resistance="470 Ohms", series=ERJ-3EK, Size / Dimension="0.063\" L x 0.031\" W (1.60mm x 0.80mm)", Supplier 1=DigiKey
R8: library part RMCF0603FT22K1, "RES 22.1K OHM 1% 1/10W 0603", Device Package="0603 (1608 Metric)", manufacturer="Stackpole Electronics Inc", Operating Temperature="-55°C ~ 155°C", Power (Watts)="0.1W, 1/10W", Ratings=AEC-Q200, Supplier Device Package=0603, Supplier Part Number 1=RMCF0603FT22K1CT-ND, Temperature Coefficient=±100ppm/°C, Tolerance=±1%, componentlink1description=Datasheet, componentlink1url=https://www.seielect.com/catalog/sei-rmcf_rmcp.pdf, componentlink2description="DigiKey Link", componentlink2url=https://www.digikey.com/en/products/detail/stackpole-electronics-inc/RMCF0603FT22K1/1760764, Composition="Thick Film", Features="Automotive AEC-Q200", Height - Seated (Max)="0.022\" (0.55mm)", lastupdated="2022-09-19 1:22:30 PM", Lifecycle Status=Active, Minimum Order=1, Number of Terminations=2, Package / Case="0603 (1608 Metric)", packaging=CutTape, Part Number=RMCF0603FT22K1, Part Status=Active, partid=6076, price=0.01, Resistance="22.1 kOhms", series=RMCF, Size / Dimension="0.061\" L x 0.031\" W (1.55mm x 0.80mm)", Supplier 1=DigiKey
R9: library part RMCF0603FT47K5, "RES 47.5K OHM 1% 1/10W 0603", Device Package="0603 (1608 Metric)", manufacturer="Stackpole Electronics Inc", Operating Temperature="-55°C ~ 155°C", Power (Watts)="0.1W, 1/10W", Ratings=AEC-Q200, Supplier Device Package=0603, Supplier Part Number 1=RMCF0603FT47K5CT-ND, Temperature Coefficient=±100ppm/°C, Tolerance=±1%, componentlink1description=Datasheet, componentlink1url=https://www.seielect.com/catalog/sei-packaging.pdf, componentlink2description="DigiKey Link", componentlink2url=https://www.digikey.com/en/products/detail/stackpole-electronics-inc/RMCF0603FT47K5/1761143, Composition="Thick Film", Features="Automotive AEC-Q200", Height - Seated (Max)="0.022\" (0.55mm)", lastupdated="2022-09-19 1:22:13 PM", Lifecycle Status=Active, Minimum Order=1, Number of Terminations=2, Package / Case="0603 (1608 Metric)", packaging=CutTape, Part Number=RMCF0603FT47K5, Part Status=Active, partid=10609, price=0.01, Resistance="47.5 kOhms", series=RMCF, Size / Dimension="0.061\" L x 0.031\" W (1.55mm x 0.80mm)", Supplier 1=DigiKey
R10: library part CRCW06031K00FKEB, "RES SMD 1K OHM 1% 1/10W 0603", Device Package="0603 (1608 Metric)", manufacturer="Vishay Dale", Operating Temperature="-55°C ~ 155°C", Power (Watts)="0.1W, 1/10W", Ratings=AEC-Q200, Supplier Device Package=0603, Supplier Part Number 1=541-2985-1-ND, Temperature Coefficient=±100ppm/°C, Tolerance=±1%, componentlink1description=Datasheet, componentlink1url=http://www.vishay.com/docs/20035/dcrcwe3.pdf, componentlink2description="DigiKey Link", componentlink2url=http://digikey.com/product-detail/en/vishay-dale/CRCW06031K00FKEB/541-2985-1-ND/6073628, Composition="Thick Film", Features="Automotive AEC-Q200", Height - Seated (Max)="0.020\" (0.50mm)", lastupdated="2022-09-19 1:22:33 PM", Lifecycle Status=Active, Minimum Order=1, Number of Terminations=2, Package / Case="0603 (1608 Metric)", packaging=CutTape, Part Number=CRCW06031K00FKEB, Part Status=Active, partid=5123, price=0.10, Resistance="1 kOhms", series=CRCW, Size / Dimension="0.063\" L x 0.033\" W (1.60mm x 0.85mm)", Supplier 1=DigiKey
R11 R12 R13: library part ERJ-3EKF4701V, "RES SMD 4.7K OHM 1% 1/10W 0603", Device Package="0603 (1608 Metric)", manufacturer="Panasonic Electronic Components", Operating Temperature="-55°C ~ 155°C", Power (Watts)="0.1W, 1/10W", Ratings=AEC-Q200, Supplier Device Package=0603, Supplier Part Number 1=P4.70KHCT-ND, Temperature Coefficient=±100ppm/°C, Tolerance=±1%, componentlink1description=Datasheet, componentlink1url=https://industrial.panasonic.com/cdbs/www-data/pdf/RDA0000/AOA0000C304.pdf, componentlink2description="DigiKey Link", componentlink2url=https://www.digikey.com/en/products/detail/panasonic-electronic-components/ERJ-3EKF4701V/1746419, Composition="Thick Film", Features="Automotive AEC-Q200", Height - Seated (Max)="0.022\" (0.55mm)", lastupdated="2022-09-19 1:22:31 PM", Lifecycle Status=Active, Minimum Order=1, Number of Terminations=2, Package / Case="0603 (1608 Metric)", packaging=TapeAndReel, Part Number=ERJ-3EKF4701V, Part Status=Active, partid=5645, price=0.01, Resistance="4.7 kOhms", series=ERJ-3EK, Size / Dimension="0.063\" L x 0.031\" W (1.60mm x 0.80mm)", Supplier 1=DigiKey
R14 R15 R16 R17 R18 R19: library part RT0603FRE0710KL, "RES SMD 10K OHM 1% 1/10W 0603", Device Package="0603 (1608 Metric)", manufacturer=Yageo, Operating Temperature="-55°C ~ 155°C", Power (Watts)="0.1W, 1/10W", Supplier Device Package=0603, Supplier Part Number 1=YAG2321CT-ND, Temperature Coefficient=±50ppm/°C, Tolerance=±1%, componentlink1description=Datasheet, componentlink1url=https://www.yageo.com/upload/media/product/productsearch/datasheet/rchip/PYu-RT_1-to-0.01_RoHS_L_11.pdf, componentlink2description="DigiKey Link", componentlink2url=https://www.digikey.com/en/products/detail/yageo/RT0603FRE0710KL/1075040, Composition="Thin Film", Height - Seated (Max)="0.022\" (0.55mm)", lastupdated="2022-09-19 1:22:31 PM", Lifecycle Status=Active, Minimum Order=1, Number of Terminations=2, Package / Case="0603 (1608 Metric)", packaging=TapeAndReel, Part Number=RT0603FRE0710KL, Part Status=Active, partid=5671, price=0.01, Resistance="10 kOhms", series=RT, Size / Dimension="0.063\" L x 0.031\" W (1.60mm x 0.80mm)", Supplier 1=DigiKey
R20 R22: library part ERJ-PA3F10R0V, "RES SMD 10 OHM 1% 1/3W 0603", Device Package="0603 (1608 Metric)", manufacturer="Panasonic Electronic Components", Operating Temperature="-55°C ~ 155°C", Power (Watts)="0.333W, 1/3W", Ratings=AEC-Q200, Supplier Device Package=0603, Supplier Part Number 1=P10.00BYCT-ND, Temperature Coefficient=±100ppm/°C, Tolerance=±1%, componentlink1description=Datasheet, componentlink1url=https://industrial.panasonic.com/cdbs/www-data/pdf/RDO0000/AOA0000C331.pdf, componentlink2description="DigiKey Link", componentlink2url=https://www.digikey.com/en/products/detail/panasonic-electronic-components/ERJ-PA3F10R0V/5035852, Composition="Thick Film", Features="Automotive AEC-Q200, Pulse Withstanding", Height - Seated (Max)="0.022\" (0.55mm)", lastupdated="2023-01-02 8:30:25 PM", Lifecycle Status=Active, Minimum Order=1, Number of Terminations=2, Package / Case="0603 (1608 Metric)", packaging=TapeAndReel, Part Number=ERJ-PA3F10R0V, Part Status=Active, partid=5368, price=0.01, Resistance="10 Ohms", series=ERJ-PA3, Size / Dimension="0.063\" L x 0.031\" W (1.60mm x 0.80mm)", Supplier 1=DigiKey
R21: library part PMR25HZPFV2L00, "RES 0.002 OHM 1% 1W 1210", Device Package="1210 (3225 Metric)", manufacturer="Rohm Semiconductor", Operating Temperature="-55°C ~ 155°C", Power (Watts)=1W, Ratings=AEC-Q200, Supplier Device Package=1210, Supplier Part Number 1=RHM.002APCT-ND, Temperature Coefficient=±100ppm/°C, Tolerance=±1%, componentlink1description=Datasheet, componentlink1url=https://www.rohm.com/datasheet/PMR18EZPFV/pmr-e, componentlink2description="DigiKey Link", componentlink2url=https://www.digikey.com/en/products/detail/rohm-semiconductor/PMR25HZPFV2L00/1767302, Composition="Metal Element", Features="Automotive AEC-Q200, Current Sense", Height - Seated (Max)="0.019\" (0.47mm)", lastupdated="2023-01-02 8:50:32 PM", Lifecycle Status=Active, Minimum Order=1, Number of Terminations=2, Package / Case="1210 (3225 Metric)", packaging=TapeAndReel, Part Number=PMR25HZPFV2L00, Part Status=Active, partid=1377, price=0.17, Resistance="2 mOhms", series=PMR, Size / Dimension="0.126\" L x 0.098\" W (3.20mm x 2.50mm)", Supplier 1=DigiKey
R23 R24 R28 R29: library part TLRZ1JTTD, "RES 0 OHM JUMPER 0603", Device Package="0603 (1608 Metric)", manufacturer="KOA Speer Electronics, Inc.", Operating Temperature="-55°C ~ 170°C", Ratings=AEC-Q200, Supplier Device Package=0603, Supplier Part Number 1=2019-TLRZ1JTTDCT-ND, Tolerance=Jumper, componentlink1description=Datasheet, componentlink1url=http://www.koaspeer.com/catimages/Products/TLRZ/TLRZ.pdf, componentlink2description="DigiKey Link", componentlink2url=https://www.digikey.com/en/products/detail/koa-speer-electronics-inc/TLRZ1JTTD/9845493, Composition="Metal Element", Features="Automotive AEC-Q200, Current Sense", Height - Seated (Max)="0.022\" (0.55mm)", lastupdated="2023-01-02 8:30:27 PM", Lifecycle Status=Active, Minimum Order=1, Number of Terminations=2, Package / Case="0603 (1608 Metric)", packaging=TapeAndReel, Part Number=TLRZ1JTTD, Part Status=Active, partid=4851, price=0.08, Resistance="0 Ohms", series=TLRZ, Size / Dimension="0.063\" L x 0.031\" W (1.60mm x 0.80mm)", Supplier 1=DigiKey
R25: library part RC0603FR-07158KL, "RES 158K OHM 1% 1/10W 0603", Device Package="0603 (1608 Metric)", manufacturer=Yageo, Operating Temperature="-55°C ~ 155°C", Power (Watts)="0.1W, 1/10W", Supplier Device Package=0603, Supplier Part Number 1=311-158KHRCT-ND, Temperature Coefficient=±100ppm/°C, Tolerance=±1%, componentlink1description=Datasheet, componentlink1url=https://www.yageo.com/upload/media/product/productsearch/datasheet/rchip/PYu-RC_Group_51_RoHS_L_10.pdf, componentlink2description="DigiKey Link", componentlink2url=https://www.digikey.com/en/products/detail/yageo/RC0603FR-07158KL/726963, Composition="Thick Film", Features="Moisture Resistant", Height - Seated (Max)="0.022\" (0.55mm)", lastupdated="2023-01-02 8:30:16 PM", Lifecycle Status=Active, Minimum Order=1, Number of Terminations=2, Package / Case="0603 (1608 Metric)", packaging=CutTape, Part Number=RC0603FR-07158KL, Part Status=Active, partid=7687, price=0.01, Resistance="158 kOhms", series=RC_L, Size / Dimension="0.063\" L x 0.031\" W (1.60mm x 0.80mm)", Supplier 1=DigiKey